# Altium PCB Audio Amplifier.PcbDoc
Units mil, origin at the board's own origin, x right, y up, seen from the top; angles counter-clockwise.
Board outline 4000 x 3000 mil, 4 copper layers (Top Layer, Internal Plane 1, Internal Plane 2, Bottom Layer), stack 18.2 mil thick; 76 components, 51 nets, 223 pads, 10 vias.
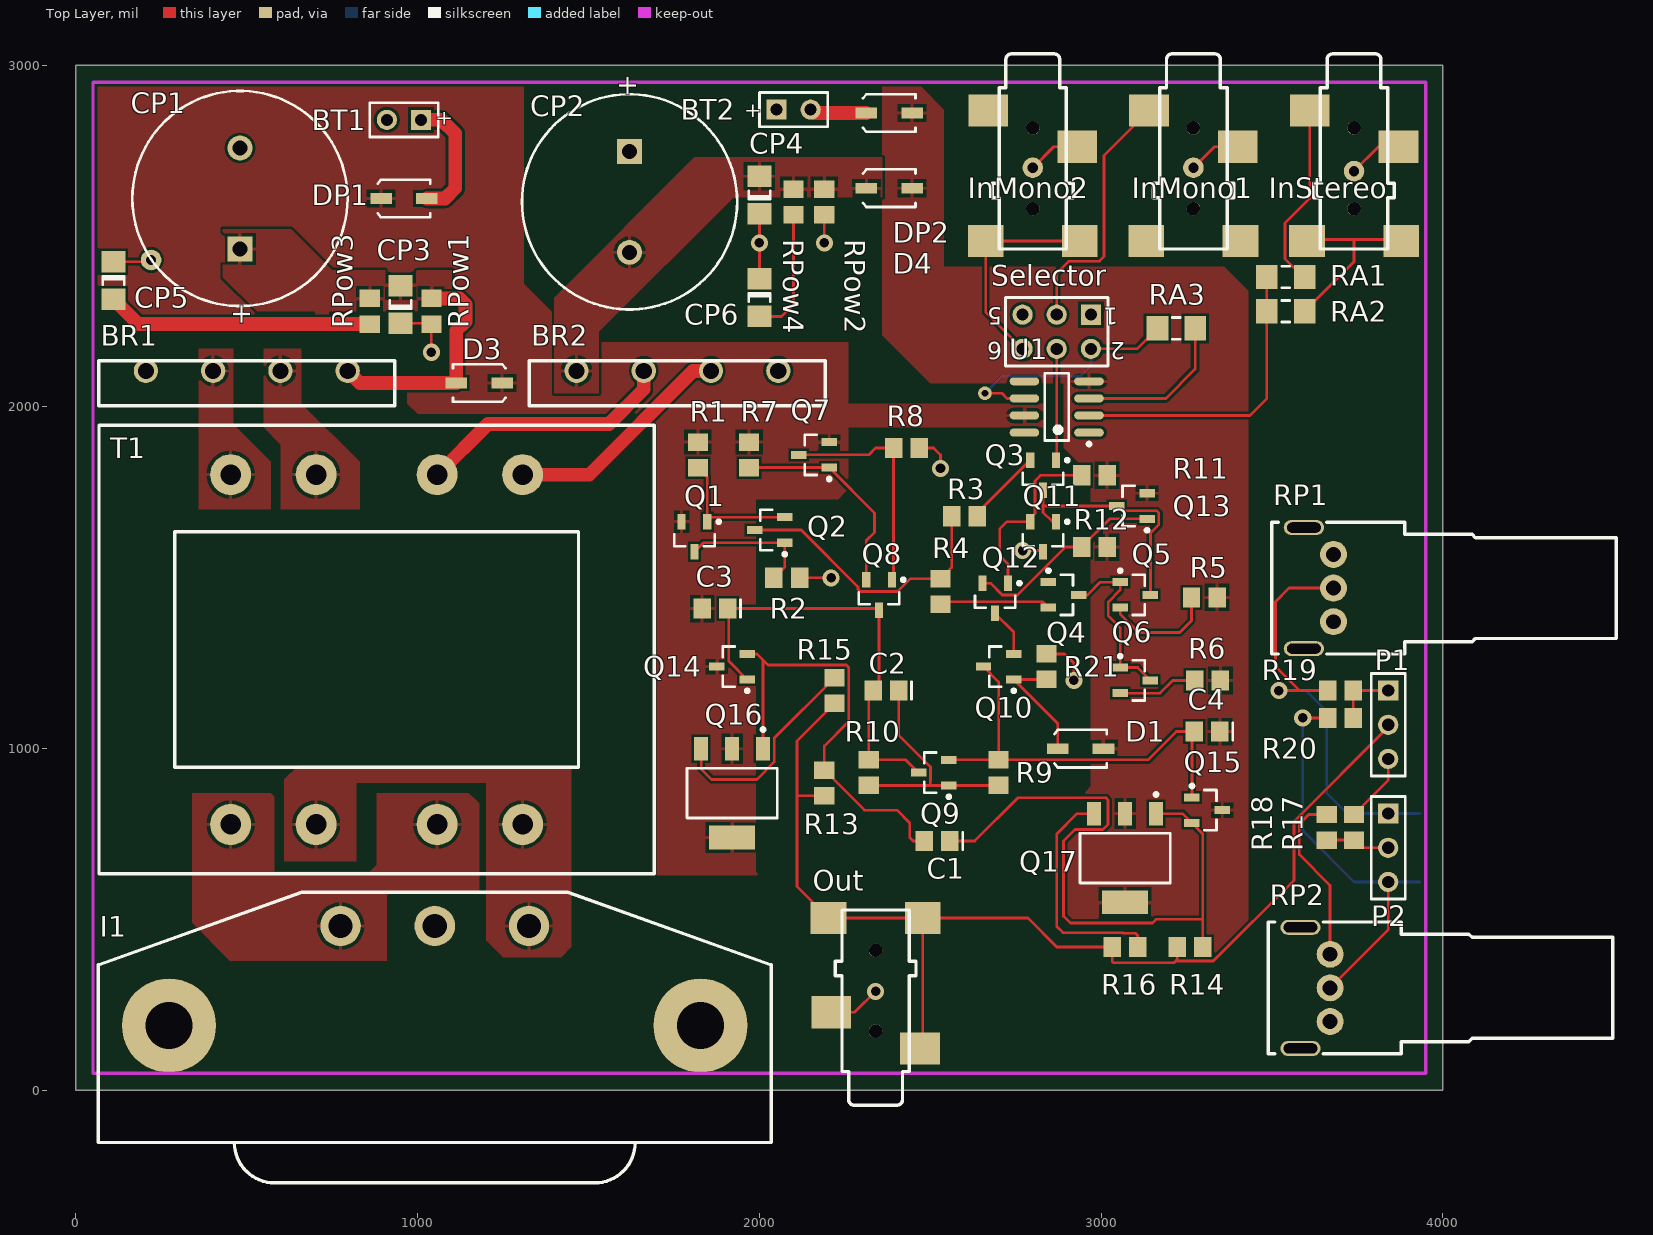
[diagram p0: Top Layer view]
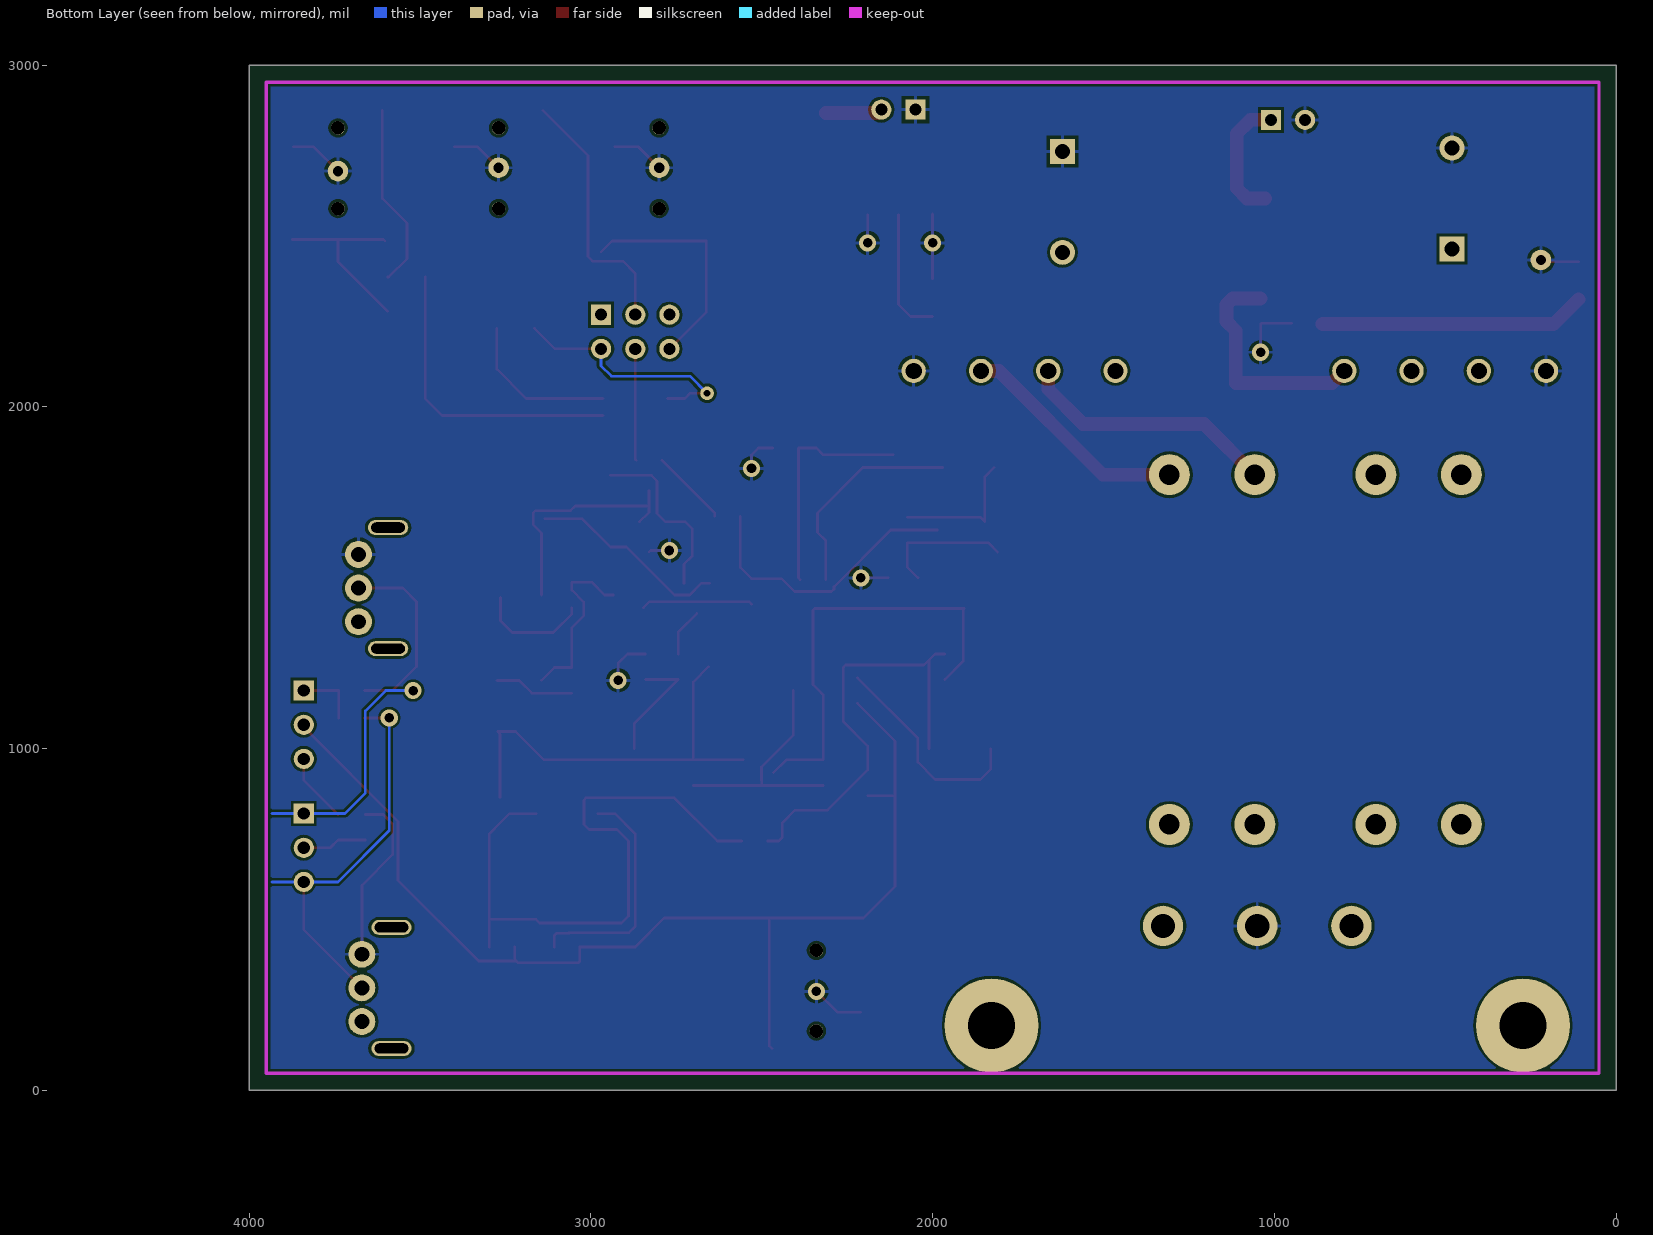
[diagram p1: Bottom Layer view, seen from below]
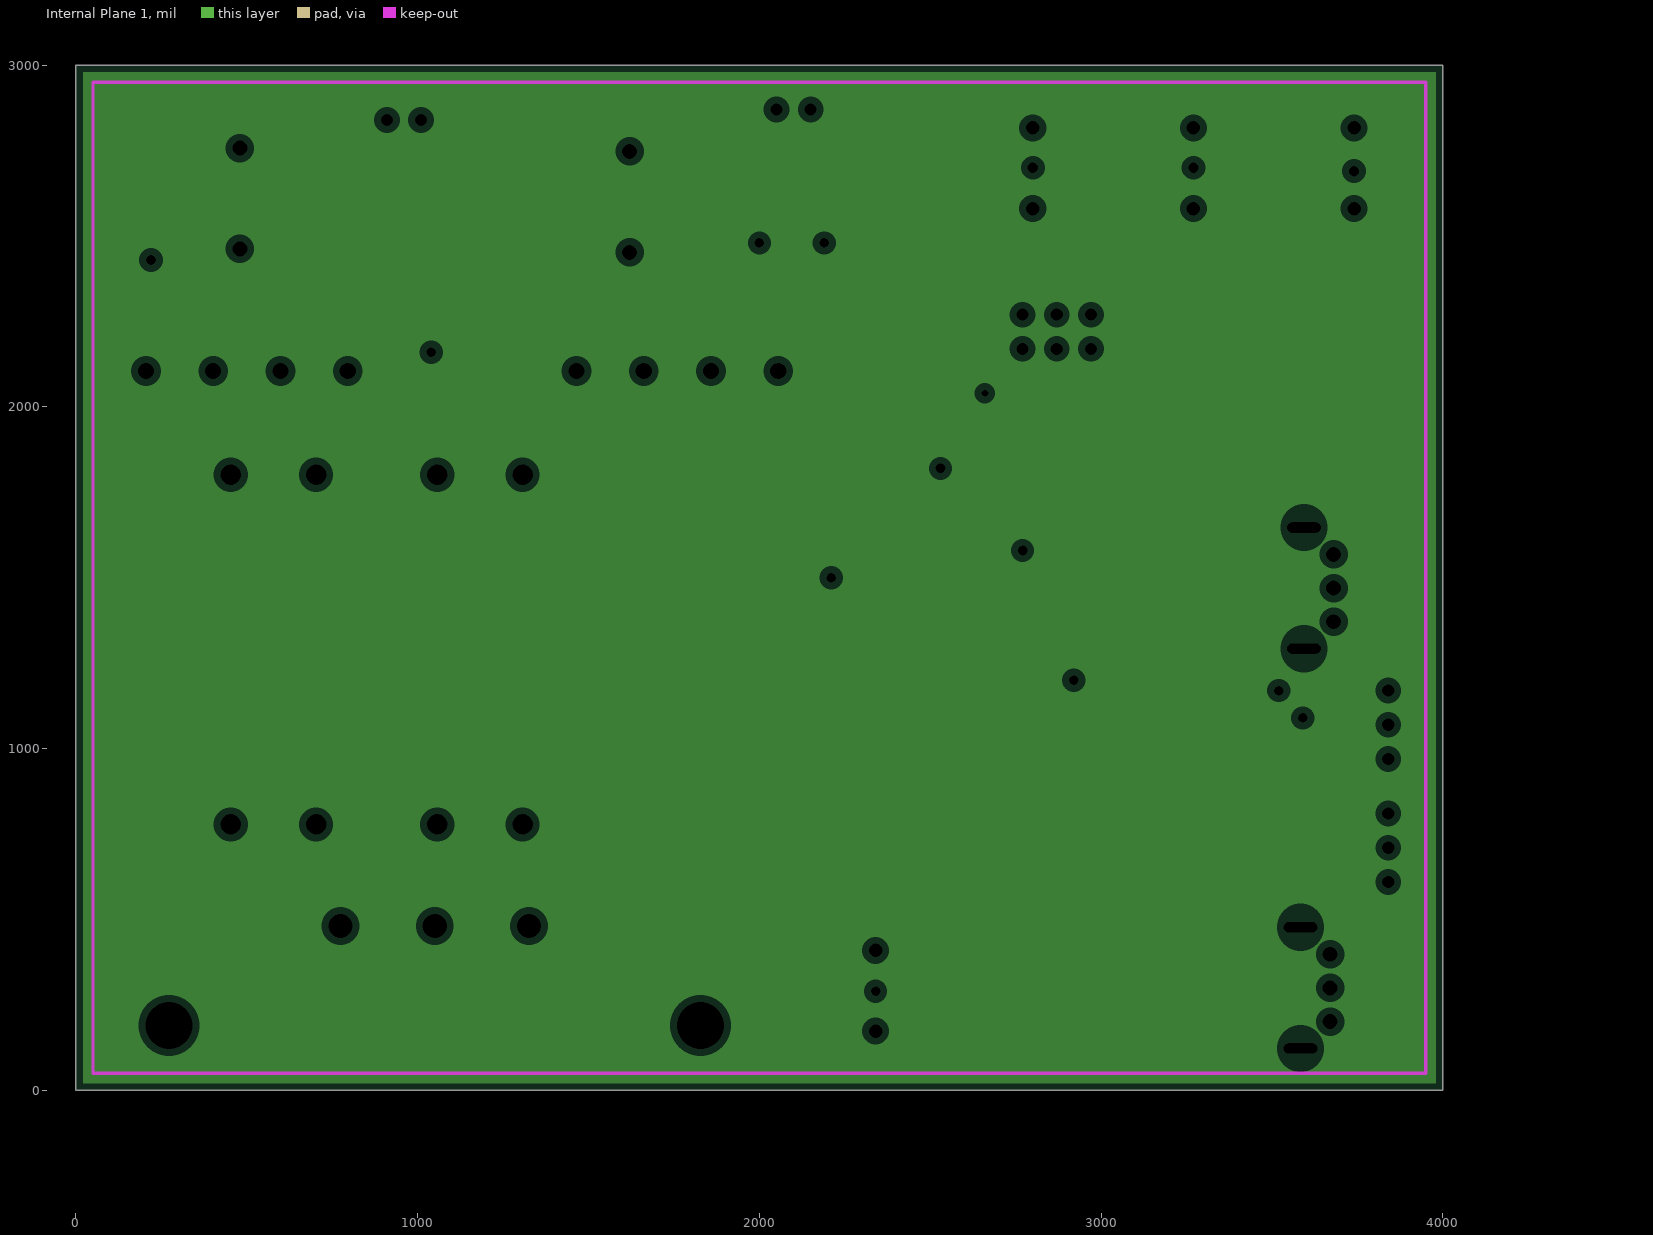
[diagram p2: Internal Plane 1, clearances drawn from the general rule]
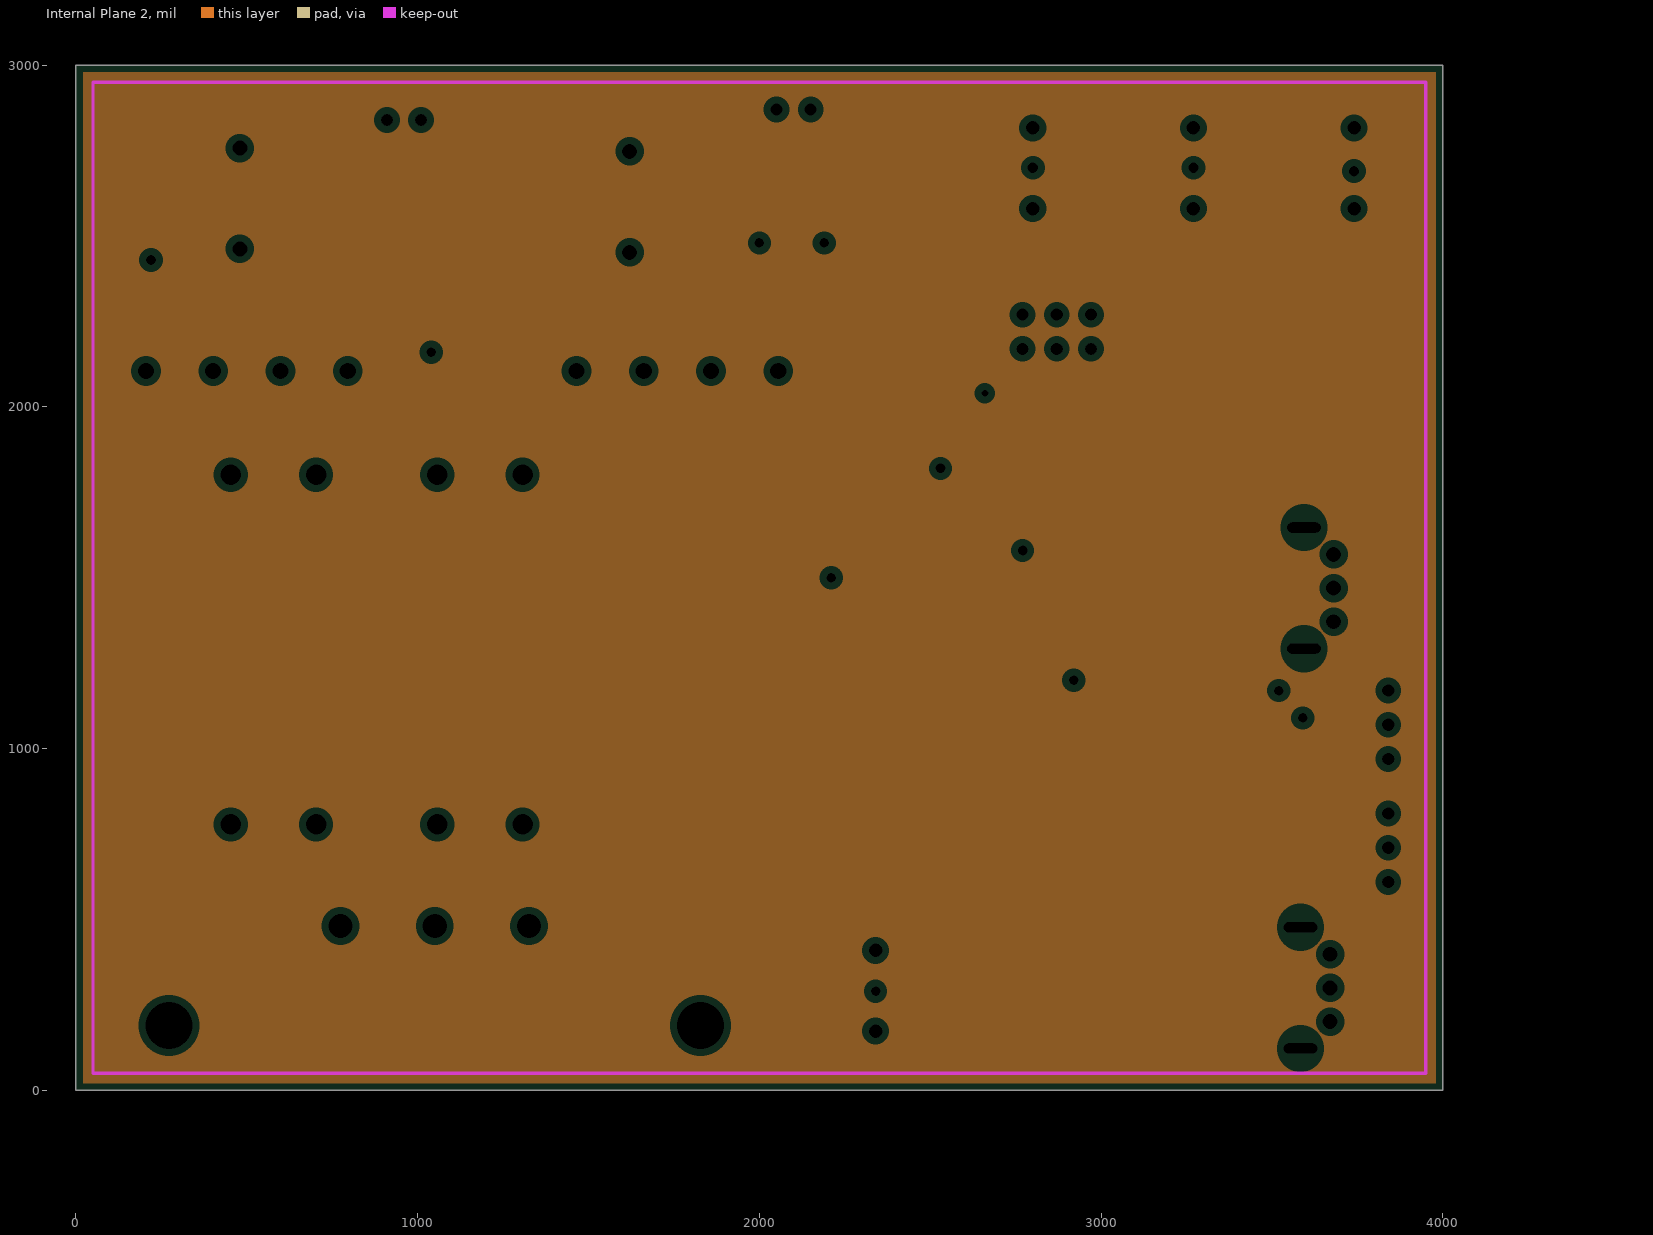
[diagram p3: Internal Plane 2, clearances drawn from the general rule]

## Layer stack, top to bottom
Top Solder: solder mask 0.4, Solder Resist, Dk 3.5
Top Layer: signal copper 1.4
Internal Plane 1: plane copper 1.4
Internal Plane 2: plane copper 1.4
Dielectric 1: dielectric 12.6, FR-4, Dk 4.8
Bottom Layer: signal copper 1.4
Bottom Solder: solder mask 0.4, Solder Resist, Dk 3.5

## Board outline
0,0 4000,0 4000,3000 0,3000

## Design rules (kind name [scope] priority, off if disabled: settings)
Clearance [All] p1: gap=8
Height [All] p1: minheight=0 maxheight=2000 prefheight=500
PlaneClearance [All] p1: clearance=20
PlaneConnect [All] p1: planeconnectstyle=Relief reliefexpansion=20 reliefentries=4 reliefconductorwidth=10 reliefairgap=10
PolygonConnect [All] p1: connectstyle=Relief reliefconductorwidth=10 reliefentries=4 polygonreliefangle="90 Angle" airgapwidth=10
RoutingVias [All] p1: holewidth=25 width=40 viastyle="Through Hole" minholewidth=28 minwidth=50 maxholewidth=28 maxwidth=50
SolderMaskExpansion [All] p1: expansion=4
Width [All] p1: maxlimit=50 minlimit=8 preferedwidth=8 minimp=50.000000 maximp=50.000000 favimp=50.000000
26 further rules are at their usual default settings.

## Components (designator, comment, footprint, x,y, rotation, side; value= is the part's Value field where it differs from the comment)
BR1 "Bridge Rectifier" "Bridge Rectifier" 500,2070 r0 top
BR2 "Bridge Rectifier" "Bridge Rectifier" 1760,2070 r0 top
BT1 "Battery" BAT-2 960,2840 r180 top
BT2 "Battery" BAT-2 2100,2870 r0 top
C1 "C0805" 0805 2520,730 r180 top
C2 "C0805" 0805 2370,1170 r180 top
C3 "C0805" 0805 1870,1410 r180 top
C4 "C0805" 0805 3310,1050 r180 top
CP1 "1000uF" CAPPR7.5-16X25 480,2610 r90 top
CP2 "1000uF" CAPPR7.5-16X25 1620,2600 r270 top
CP3 "C1206" 1206 950,2300 r90 top
CP4 "C1206" 1206 2000,2620 r90 top
CP5 "C1206" 1206 110,2370 r270 top
CP6 "C1206" 1206 2000,2320 r270 top
D1 "BZT52C5V6" SOD-123 2940,1000 r180 top
D3 "BZT52C2V7" SOD-123 1180,2070 r0 top
D4 "BZT52C2V7" SOD-123 2380,2640 r180 top
DP1 "BZT52C2V7" SOD-123 960,2610 r180 top
DP2 "BZT52C2V7" SOD-123 2380,2860 r180 top
I1 "IEC Connector" "IEC Connector" 1050,190 r0 top
InMono1 "Stereo 3.5mm Jack" "3.5mm Audio Jack" 3270,2970 r0 top
InMono2 "Stereo 3.5mm Jack" "3.5mm Audio Jack" 2800,2970 r0 top
InStereo "Stereo 3.5mm Jack" "3.5mm Audio Jack" 3740,2970 r0 top
Out "Stereo 3.5mm Jack" "3.5mm Audio Jack" 2340,20 r180 top
P1 "Header 3" HDR1X3 3840,1170 r270 top
P2 "Header 3" HDR1X3 3840,810 r270 top
Q1 "BCX71K" SOT-23B_N 1810,1620 r270 top
Q2 "BCX71K" SOT-23B_N 2030,1640 r180 top
Q3 "BCX71K" SOT-23B_N 2830,1800 r270 top
Q4 "BCX71K" SOT-23B_N 2890,1450 r0 top
Q5 "BCW71" SOT-23B_N 3100,1450 r0 top
Q6 "BCW71" SOT-23B_N 3100,1200 r0 top
Q7 "BCX71K" SOT-23B_N 2160,1860 r180 top
Q8 "BCX71K" SOT-23B_N 2350,1450 r270 top
Q9 "BCW71" SOT-23B_N 2510,930 r180 top
Q10 "BCW71" SOT-23B_N 2700,1240 r180 top
Q11 "BCW71" SOT-23B_N 2830,1620 r270 top
Q12 "BCW71" SOT-23B_N 2690,1440 r270 top
Q13 "BCW71" SOT-23B_N 3090,1710 r180 top
Q14 "BCW71" SOT-23B_N 1920,1240 r180 top
Q15 "BCX71K" SOT-23B_N 3310,820 r0 top
Q16 "BF720" SOT-223 1920,870 r180 top
Q17 "BF721" SOT-223 3070,680 r180 top
R1 "ERA6Y" ERA-0805 1820,1860 r90 top
R2 "ERA6Y" ERA-0805 2080,1500 r180 top
R3 "ERA6Y" ERA-0805 2600,1680 r0 top
R4 "ERA6Y" ERA-0805 2530,1460 r90 top
R5 "ERA6Y" ERA-0805 3301.81,1442.47 r0 top
R6 "ERA6Y" ERA-0805 3311.81,1199.53 r0 top
R7 "ERA6Y" ERA-0805 1970,1860 r90 top
R8 "ERA6Y" ERA-0805 2430,1880 r180 top
R9 "ERA6Y" ERA-0805 2700,930 r270 top
R10 "ERA6Y" ERA-0805 2320,930 r90 top
R11 "ERA6Y" ERA-0805 2980,1800 r180 top
R12 "ERA6Y" ERA-0805 2980,1590 r180 top
R13 "ERA6Y" ERA-0805 2190,900 r90 top
R14 "ERA6Y" ERA-0805 3260,420 r180 top
R15 "ERA6Y" ERA-0805 2220,1170 r90 top
R16 "ERA6Y" ERA-0805 3070,420 r180 top
R17 "2000" ERA-0805 3740,770 r90 top
R18 "18000" ERA-0805 3660,770 r270 top
R19 "500" ERA-0805 3700,1170 r0 top
R20 "1500" ERA-0805 3700,1090 r0 top
R21 "ERA6Y" ERA-0805 2840,1240 r90 top
RA1 "ERJ8EN" 8-1206 3540,2380 r180 top
RA2 "ERJ8EN" 8-1206 3540,2280 r180 top
RA3 "ERJ8EN" 8-1206 3220,2230 r180 top
RP1 "Panasonic Potentiometer" "Panasonic Potentiometer" 3680,1470 r90 top
RP2 "Panasonic Potentiometer" "Panasonic Potentiometer" 3670,300 r90 top
RPow1 "100K" ERA-0805 1040,2280 r90 top
RPow2 "100K" ERA-0805 2190,2600 r90 top
RPow3 "DNP" ERA-0805 860,2280 r90 top
RPow4 "DNP" ERA-0805 2100,2600 r90 top
Selector "Header 3X2" HDR2X3 2970,2270 r180 top
T1 "Triad Class 3 Transformer" "TRIAD CLASS 3 TRANSFORMER" 880,1290 r90 top
U1 "OPA1611AID" TI-D8_N 2870,2000 r180 top

## Footprints (in the part's own frame and the unit in brackets; to place one, negate y for a bottom-side part, rotate by r counter-clockwise, add the part's x,y. Pads: shape width x height; smd on the part's side, far side on the other; paste and mask are expansions set on the pad)
"3.5mm Audio Jack" [mm]
  round 1 hole 1: 0(0,-9.9) 0(0,-3.9)
  rect 2.95x2.4 smd: 1(-3.3,-2.6) 3(3.3,-5.3)
  rect 2.65x2.4 smd: 2(-3.5,-12.3)
  rect 2.65x2.4 smd paste+0: 2(3.5,-12.3)
  silkscreen extent -3,-12.9 3,1.6
8-1206 [mm] "Chip Resistor; Body 3.1 x 1.6 mm (LxW typ)"
  rect 1.6x1.8 smd: 1(-1.4,0) 2(1.4,0)
  silkscreen extent -0.3,-0.8 0.3,0.8
0805 [mm] "Chip Capacitor; Body 2.0 x 1.2 mm (LxW typ)"
  rect 1.3x1.5 smd: 1(-0.95,0) 2(0.95,0)
  silkscreen extent -1.9,-0.65 -1.9,0.65
1206 [mm] "Chip Capacitor; Body 3.2 x 1.6 mm (LxW typ)"
  rect 1.6x1.8 smd: 1(-1.4,0) 2(1.4,0)
  silkscreen extent -0.3,-0.8 0.3,0.8
BAT-2 [mm] "Battery; 2 Leads"
  rect 1.5x1.5 hole 0.9: 1(-1.27,0)
  round 1.5 hole 0.9: 2(1.27,0)
  silkscreen extent -2.54,-1.27 2.54,1.27
"Bridge Rectifier" [mm]
  round 1.8 hole 1.2: +(7.5,0.9) -(-7.5,0.9) AC1(-2.5,0.9) AC2(2.5,0.9)
  silkscreen extent -11,-1.7 11,1.65
CAPPR7.5-16X25 [mm] "Capacitor, Electrolytic, Radial; Body 16 x 25 mm (Dia.xH typ); Pin Spacing 7.5 mm (typ)"
  rect 1.85x1.85 hole 1.1: 1(-3.75,0)
  round 1.85 hole 1.1: 2(3.75,0)
  silkscreen extent -8,-8 8,8
ERA-0805 [mm] "Chip Resistor; Body 2 x 1.3 mm (LxW typ)"
  rect 1.3x1.5 smd: 1(-0.95,0) 2(0.95,0)
HDR1X3 [mm] "Connector; Header; 3 Position"
  rect 1.5x1.5 hole 0.9: 1(0,0)
  round 1.5 hole 0.9: 2(2.54,0) 3(5.08,0)
  silkscreen extent -1.27,-1.27 6.35,1.27
HDR2X3 [mm] "Connector; Header; 3x2 Position"
  rect 1.5x1.5 hole 0.9: 1(0,0)
  round 1.5 hole 0.9: 2(0,2.54) 3(2.54,0) 4(2.54,2.54) 5(5.08,0) 6(5.08,2.54)
  silkscreen extent -1.27,-1.27 6.35,3.81
"IEC Connector" [mm]
  round 7 hole 3.5: 0(-19.75,0) 0(19.75,0)
  round 3 hole 1.8: GND(0,7.4) HOT(-7,7.4) NEUT(7,7.4)
  silkscreen extent -25,-11.7 25,9.9
"Panasonic Potentiometer" [mm]
  round 2 hole 1.1: 1(-2.5,0) 2(0,0) 3(2.5,0)
  oval 1.1x3 hole 0.75 slot 2.5 at 90 deg: 4(-4.5,2.2) 4(4.5,2.2)
  silkscreen extent -4.9,-21 4.9,4.6
SOD-123 [mm] "SOD-123; 2 Leads; Body 2.7 x 1.6 mm, (LxW)"
  rect 1.6x0.8 smd: 1(-1.7,0) 2(1.7,0)
  silkscreen extent -1.95,-1.4 1.95,1.4
SOT-23B_N [mm] "SOT23, 3-Leads, Body 2.9x1.3mm, Pitch 0.95mm, Lead Span 2.4mm, IPC Medium Density"
  rect 1.15x0.6 smd: 1(-1.125,0.95) 2(-1.125,-0.95) 3(1.125,0)
  silkscreen extent -1.25,-1.5 0.7,1.93, body extent -0.7,-1.5 0.7,1.5, height 1.14
SOT-223 [mm] "SOT-223/SC-73; 4 Leads; Body 6.7 x 7.3 mm, inc. leads (LxW max)"
  rect 1.05x1.75 smd: 1(-2.3,-3.3) 2(0,-3.3) 3(2.3,-3.3)
  rect 3.4x1.75 smd: 4(0,3.3)
  silkscreen extent -3.35,-4.85 3.35,1.85
TI-D8_N [mm] "SOIC, 8-Leads, Body 4.9x3.9mm, Pitch 1.27mm, IPC Medium Density"
  oval 2.2x0.6 smd: 1(-2.4,1.905) 2(-2.4,0.635) 3(-2.4,-0.635) 4(-2.4,-1.905) 5(2.4,-1.905) 6(2.4,-0.635) 7(2.4,0.635) 8(2.4,1.905)
  silkscreen extent -2.53,-2.5 0.9,2.88, body extent -2,-2.5 2,2.5, height 1.75
"TRIAD CLASS 3 TRANSFORMER" [mil]
  round 120 hole 60: 1(-511.81,427.17) 2(-511.81,177.17) 3(-511.81,-177.17) 4(-511.81,-427.17) 5(511.81,427.17) 6(511.81,177.17) 7(511.81,-177.17) 8(511.81,-427.17)
  silkscreen extent -656,-812 656,812

## Part data
BT1 BT2: "Multicell Battery"
C1 C2 C3 C4 CP3 CP4 CP5 CP6: "Ceramic Chip Capacitor - Standard"
CP1 CP2: library part EKA00JG247O00, "Aluminum Electrolytic Capacitor, Radial Style with Long Leads: 47uF, 350V"
D1 D3 D4 DP1 DP2: "Surface Mount Zener Diode"
P1 P2: "Header, 3-Pin"
Q1 Q2 Q3 Q4 Q7 Q8 Q15: "PNP Epitaxial Silicon Transistor"
Q5 Q6 Q9 Q10 Q11 Q12 Q13 Q14: "NPN Epitaxial Silicon Transistor"
Q16: "NPN Silicon High-Voltage Transistor"
Q17: "PNP Silicon High-Voltage Transistor"
R1 R2 R3 R4 R5 R6 R7 R8 R9 R10 R11 R12 R13 R14 R15 R16 R21: "Rectangular Thick Film Chip Resistor, 10 Ohm to 1M Ohm Range, 0.1% and 0.5% Tolerance, 0805 Size, 0.1 W"
R17 R18 R19 R20 RPow1 RPow2 RPow3 RPow4: library part ERA6Y, "Rectangular Thick Film Chip Resistor, 10 Ohm to 1M Ohm Range, 0.1% and 0.5% Tolerance, 0805 Size, 0.1 W"
RA1 RA2 RA3: "Precision Thick Film Chip Resistor, 10 Ohm to 2.2M Ohm Range, 1% Tolerance, 1206 Size, 0.125 W"
Selector: "Header, 3-Pin, Dual row"
U1: "1.1 nV/rtHz Noise, Low Power, Precision Operational Amplifier, 4.5 to 36 V, -40 to 85 degC, 8-pin SOIC (D8), Green (RoHS & no Sb/Br)"

## Free pads (board coordinates)
  round 60 hole 30: 0(220,2430) 1(2800,2700) 2(3270,2700) 3(3740,2690)
  round 40 hole 20: 0(2660,2040)

## Via types
v1: diameter 50, hole 28, Top Layer to Bottom Layer, 10 vias

## Nets (pads, with @x,y where several pads share a name; then routed paths per layer and width w, separated by ;. In a path a pad name is that pad's centre, name@x,y a point inside that pad or via, vN(x,y) a via of type N, cw(c..) or ccw(c..) an arc to the next point about the centre after c; other vN are vias at no path point)
AUDIO_IN: Q3.1 Selector.4 | length 326.8
  Top Layer w8: Q3.1 2870,1846.89 Selector.4
BATTNEG: BT2.2 DP2.2 | length 167.2
  Top Layer w8: BT2.2 BT2.2@2160,2860
  Top Layer w40: BT2.2@2160,2860 DP2.2
BATTPOS: BT1.1 DP1.1 | length 372.1
  Top Layer w40: BT1.1 1070,2840 1110,2800 1110,2640 1080,2610 DP1.1
FEEDBACK: P2.2 R17.1 R18.2 | length 189.4
  Top Layer w8: R18.2 R17.1 3762.6,710 P2.2
GND: BR1.- BR2.+ BT1.2 BT2.1 CP1.2 CP2.1 CP3.1 CP4.1 CP5.1 CP6.1 I1.GND InMono1.3 InMono2.3 InStereo.3 Out.3 pad.0@220,2430 pad.1 pad.2 pad.3 Q11.3 R2.1 R8.1 R18.1 R21.2 RP1.3 RP2.3 RPow1.1 RPow2.1 | length 2078.1
  Top Layer w8: CP5.1 pad.0@215.12,2425.12 ; CP3.1 1037.72,2244.88 RPow1.1 v1(1040,2160) ; CP6.1 v1(2000,2480) CP4.1 ; R2.1@2130,1500 v1@2207.4,1500 ; v1(2190,2480) RPow2.1 ; Out.3 2278.66,228.66 v1(2340,290) ; R8.1 2510,1880 2530,1860 v1(2530,1820) ; v1(2770,1580) 2825.71,1580 Q11.3 ; pad.1 2861.34,2761.34 InMono2.3 ; R21.2 2892.6,1277.4 2920,1250 v1(2920,1200) ; pad.2 3331.34,2761.34 InMono1.3 ; R18.1 3607.4,807.4 3580,780 3580,690 3670,600 RP2.3 ; pad.3 3811.34,2761.34 InStereo.3
  other v1: 2210,1500
IPS_OUT: Q3.3 Q5.3 Q11.1 Q13.3 | length 699.8
  Top Layer w8: Q3.3 2830,1710 ; Q11.1@2857.4,1664.29 2830,1691.69 2830,1710 ; Q5.3 3144.29,1631.18 3168.93,1655.82 3168.93,1689.38 3161.9,1696.41 3059.3,1696.41 Q13.3 2830,1710
NEG: C4.1 D1.1 D4.1 DP2.1 Q13.2 Q15.3 Q17.2 Q17.4 R5.2 R6.2 R11.1 R12.1 U1.4
NetBR1_AC1: BR1.AC1 T1.5
NetBR1_AC2: BR1.AC2 T1.6
NetBR2_AC1: BR2.AC1 T1.7 | length 761.7
  Top Layer w40: T1.7 1205.35,1950 1560,1950 1661.57,2051.57 BR2.AC1
NetBR2_AC2: BR2.AC2 T1.8 | length 677
  Top Layer w40: T1.8 1501.81,1801.81 1805.43,2105.43 BR2.AC2
NetC1_1: C1.1 Q15.2 Q17.1 R14.1 | length 1871.7
  Top Layer w8: C1.1 2630,730 2756.37,856.37 3013.63,856.37 3020,850 3020,778.38 3005.09,763.47 2923.47,763.47 2890,730 2890,510 2910,490 3150,490 3160.55,500.55 3296.85,500.55 3297.4,500 ; Q17.1 3238.39,809.92 Q15.2 3297.4,750.91 3297.4,500 ; R14.1 3297.4,500
NetC1_2: C1.2 Q14.2 Q16.1 R13.2 | length 1306.7
  Top Layer w8: Q14.2 1992.6,1277.4 2010.55,1259.45 ; Q16.1 2010.55,1259.45 ; C1.2 2450,730 2440,740 2440,782.6 2402.6,820 2307.4,820 R13.2 2190,1008.44 2261.53,1079.97 2261.53,1237.96 2254.5,1244.99 2025.01,1244.99 2010.55,1259.45
NetC2_1: C2.1 Q9.1 R9.2 R10.1 | length 696
  Top Layer w8: R10.1 2500,892.6 ; C2.1 2407.4,1039.73 2500.35,946.78 2500.35,906.19 2500,905.84 2500,892.6 ; R9.2 2500,892.6
NetCP5_2: CP5.2 RPow3.1 | length 779.9
  Top Layer w40: CP5.2 182.28,2242.6 RPow3.1
NetCP6_2: CP6.2 RPow4.1 | length 377.1
  Top Layer w8: CP6.2 2064.88,2264.88 2100,2300 RPow4.1
NetD1_2: D1.2 Q10.1 R21.1 | length 351.6
  Top Layer w8: R21.1 Q10.1 2873.07,1073.82 D1.2
NetI1_HOT: I1.HOT T1.1 T1.3
NetI1_NEUT: I1.NEUT T1.2 T1.4 | length 33.1
  Top Layer w8: I1.NEUT I1.NEUT@1325.59,514.41
NetInMono1_1: InMono1.1 Selector.3 | length 761.3
  Top Layer w8: Selector.3 2870,2390 2906.5,2426.5 2994.93,2426.5 3008.43,2440 3008.43,2735.99 InMono1.1
NetInMono2_2: InMono2.2 Selector.6 | length 681.5
  Top Layer w8: Selector.6 2662.2,2277.8 2662.2,2485.75 2937.8,2485.75 InMono2.2@2970,2453.54
NetInStereo_1: InStereo.1 RA1.1 | length 543.2
  Top Layer w8: RA1.1 3591.57,2380 3538.04,2433.53 3538.04,2537.96 3610.08,2610 InStereo.1
NetInStereo_2: InStereo.2 RA2.1 | length 543.1
  Top Layer w8: RA2.1 3740,2424.88 3740,2490 ; InStereo.2@3602.2,2485.75 3606.46,2490 3740,2490 ; InStereo.2@3873.54,2490 3740,2490
NetP1_1: P1.1 R19.2 R20.2 | length 182.6
  Top Layer w8: R20.2 R19.2 P1.1
NetP1_3: P1.3 R17.2 | length 204
  Top Layer w8: R17.2 3840,907.4 P1.3
NetP2_1: P2.1 R19.1 RP1.2 | length 1320.9
  Top Layer w8: v1(3520,1170) 3580,1170 ; R19.1 3580,1170 ; RP1.2 3550,1470 3510,1430 3510,1240 3580,1170
  Bottom Layer w8: v1(3520,1170) 3600,1170 3660,1110 3660,870 3720,810 P2.1 3933,810
NetP2_3: P2.3 R20.1 RP2.2 | length 1188.1
  Top Layer w8: v1(3590,1090) R20.1 ; RP2.2 3840,470 P2.3
  Bottom Layer w8: v1(3590,1090) 3590,760 3740,610 P2.3 3933,610
NetQ1_1: Q1.1 Q2.2 R1.1 | length 402
  Top Layer w8: R1.1 1847.4,1795.2 Q1.1 1860.51,1677.4 Q2.2
NetQ1_3: Q1.3 Q2.1 R2.2 | length 391.2
  Top Layer w8: Q1.3 1836.89,1602.6 Q2.1 2074.29,1531.69 R2.2
NetQ2_3: Q2.3 R3.1 R4.2 | length 834.7
  Top Layer w8: Q2.3 2122.33,1640 2288.79,1473.54 2288.79,1466.68 2295.82,1459.65 2404.18,1459.65 2441.93,1497.4 R4.2 2562.6,1530 R3.1
NetQ3_2: Q3.2 R3.2 | length 228.6
  Top Layer w8: R3.2 2637.4,1689.09 Q3.2
NetQ4_2: Q4.2 R4.1 | length 326.3
  Top Layer w8: R4.1 2537.75,1430.35 2827.96,1430.35 Q4.2
NetQ4_3: Q4.3 Q5.1 Q6.1 Q6.3 | length 519.7
  Top Layer w8: Q4.3 2960,1450 2997.4,1487.4 Q5.1 3055.71,1464.02 3021.07,1429.38 3021.07,1388.79 3055.71,1354.15 Q6.1 3106.89,1237.4 Q6.3
NetQ5_2: Q5.2 R5.1 | length 331.8
  Top Layer w8: Q5.2 3055.71,1394.29 3110,1340 3230,1340 3264.41,1374.41 R5.1
NetQ6_2: Q6.2 R6.1 | length 234
  Top Layer w8: Q6.2 3172.6,1162.6 3209.53,1199.53 R6.1
NetQ7_1: Q7.1 Q8.2 R7.1 | length 627.7
  Top Layer w8: R7.1 Q7.1 2337,1689.89 2337,1633 2312.6,1608.6 Q8.2
NetQ7_3: Q7.3 Q8.1 R8.2 | length 673
  Top Layer w8: Q7.3 2320,1860 2340,1880 R8.2 2392.6,1499.49 Q8.1
NetQ10_2: Q10.2 Q12.3 | length 140.8
  Top Layer w8: Q12.3 2744.29,1341.42 Q10.2
NetQ11_2: Q11.2 Q12.1 R11.2 | length 529.4
  Top Layer w8: Q12.1 2727.4,1540.27 2703,1564.67 2703,1643 2724.29,1664.29 2782.6,1664.29 2806.19,1687.88 2806.19,1783.32 2822.87,1800 R11.2
NetQ12_2: Q12.2 Q13.1 R12.2 | length 588.4
  Top Layer w8: Q12.2 2675.98,1484.29 2710.62,1449.65 2755.36,1449.65 2895.71,1590 R12.2 3025.2,1672.6 Q13.1
NetQ16_3: Q16.3 R15.2 | length 626.8
  Top Layer w8: Q16.3 1829.45,940.55 1860,910 1992.72,910 2043.22,960.5 2043.22,1030.62 R15.2
NetQ17_3: Q17.3 R16.1 | length 685.6
  Top Layer w8: Q17.3 2929.92,809.92 2870,750 2870,480 2888.47,461.53 3063.16,461.53 3064.69,460 3100,460 3107.4,452.6 R16.1
NetRA1_2: RA1.2 RA2.2 U1.2 | length 896.2
  Top Layer w8: U1.2 3435,1975 3484.88,2024.88 RA2.2 RA1.2
NetRA3_1: RA3.1 U1.3 | length 465.4
  Top Layer w8: U1.3 3189.32,2025 3275.12,2110.8 RA3.1
NetRA3_2: pad.0@2660,2040 RA3.2 Selector.2 U1.6 | length 734.6
  Top Layer w8: pad.0@2660,2040 2710,2040 2725,2025 U1.6 ; Selector.2 3104.88,2170 RA3.2
  Bottom Layer w8: pad.0@2660,2040 2710,2090 2940,2090 2970,2120 Selector.2
OUTPUT: Out.1 Out.2 P1.2 R13.1 R14.2 R15.1 R16.2 | length 3332.1
  Top Layer w8: R13.1 2112.6,862.6 2110,860 ; R15.1 2110,1022.6 2110,860 ; Out.1 2477.8,130.24 Out.2@2477.8,504.25 ; R14.2 3222.6,382.6 3218.47,378.47 ; P1.2 3840,1062.63 3564,786.63 3564,614.51 3327.96,378.47 3218.47,378.47 ; 2110,860 2110,596.46 2202.2,504.25 Out.2@2477.8,504.25 ; Out.2@2477.8,504.25 2785.75,504.25 2870,420 R16.2 3032.6,377.4 3036.52,373.48 3213.48,373.48 3218.47,378.47
POS: C3.2 D3.2 DP1.2 Q1.2 Q7.2 Q14.3 Q16.2 Q16.4 R1.2 R7.2 U1.7
"UNFILT NEG": BR2.- CP2.2 CP4.2 D4.2 RPow2.2 RPow4.2
"UNFILT POS": BR1.+ CP1.1 CP3.2 D3.1 RPow1.2 RPow3.2 | length 680.8
  Top Layer w40: BR1.+ 830.71,2070 D3.1 1113.07,2223.07 1140,2250 1140,2300 1122.6,2317.4 RPow1.2
VAS_BOT: C4.2 Q9.2 Q10.3 Q15.1 R9.1 | length 1238.9
  Top Layer w8: Q9.2 R9.1 ; Q10.3 2700,1195.71 R9.1 ; Q15.1 3265.71,1043.11 C4.2 3220,1050 3137.4,967.4 R9.1
VAS_TOP: C2.2 C3.1 Q8.3 Q9.3 Q14.1 R10.2 | length 1287.3
  Top Layer w8: Q14.1 1910.35,1256.54 1910.35,1407.06 C3.1 2345.71,1410 Q8.3 2350,1187.4 C2.2 2320,1157.4 R10.2 2428.31,967.4 Q9.3
pads on no net: I1.0 InMono1.0 InMono1.2 InMono2.0 InMono2.1 InStereo.0 Out.0 Q4.1 RP1.1 RP1.4 RP2.1 RP2.4 Selector.1 Selector.5 U1.1 U1.5 U1.8

## Polygon pours and split planes (outlines as drawn)
GND on Bottom Layer "Bottom Layer-No Net" (solid, remove dead copper, pour order 13): 50,2950 3950,2950 3950,50 50,50
"UNFILT POS" on Top Layer "Bottom Layer-No Net" (solid, remove dead copper, pour order 11): 430,2520 630,2520 750,2400 1100,2400 1100,2280 740,2280 740,2150 700,2150 700,2280 530,2280 430,2380
POS on Top Layer "Bottom Layer-No Net" (solid, remove dead copper, pour order 19): 1700,630 2000,630 1990,640 1990,1730 2230,1730 2260,1760 2260,1940 2830,1940 2830,2010 2260,2010 2260,2190 1480,2190 1310,2360 1310,2940 70,2940 60,2950 60,2150 940,2150 970,2120 970,2010 1000,1980 1680,1980 1680,1970 1700,1950
NetI1_HOT on Top Layer "Bottom Layer-No Net" (solid, pour order 15): 340,870 570,870 580,860 580,640 860,640 880,660 880,870 1150,870 1170,850 1180,840 1180,580 920,580 910,570 910,380 450,380 340,490 340,870
NetI1_NEUT on Top Layer "Bottom Layer-No Net" (solid, pour order 16): 600,860 610,850 610,670 820,670 820,880 820,900 1200,900 1200,440 1250,390 1420,390 1450,420 1450,950 650,950 610,910 610,850
NetBR1_AC1 on Top Layer "Bottom Layer-No Net" (solid, pour order 17): 360,2170 460,2170 460,1950 570,1840 570,1700 360,1700 360,2170
NetBR1_AC2 on Top Layer "Bottom Layer-No Net" (solid, pour order 18): 550,2170 660,2170 660,2010 830,1840 830,1700 600,1700 600,1870 600,1890 550,1940 550,2170
"UNFILT NEG" on Top Layer "Bottom Layer-No Net" (solid, remove dead copper, pour order 12): 1400,2040 1530,2040 1530,2220 1924.25,2614.25 2360,2614.25 2360,2730 1810,2730 1400,2320
NEG on Top Layer "Bottom Layer-No Net" (solid, remove dead copper, pour order 14): 2360,2950 2360,2210 2500,2070 2890,2070 2890,1880 2970,1800 2970,890 2850,770 2850,220 2950,120 3270,120 3430,280 3430,2340 3360,2410 2540,2410 2540,2870 2460,2950

## Keep-outs
Keep-Out Layer:
  lines w10: 50,50 50,2950 3950,2950 3950,50 50,50

## Dimensions
50,50 to 50,2950 on Mechanical 1
50,50 to 3950,50 on Mechanical 1

## Text inside footprints (layer, text, board x,y; h text height)
BT1: Top Overlay "+" at 1104.49,2862.72 h45.28 r180
BT2: Top Overlay "+" at 1955.51,2847.28 h45.28
CP1: Top Overlay "+" at 509.53,2236.97 h59.06 r90
CP2: Top Overlay "+" at 1590.47,2973.03 h59.06 r270
Selector: Top Overlay "6" at 2710,2190 h50 r180; Top Overlay "5" at 2710,2290 h50 r180; Top Overlay "2" at 3070,2190 h50 r180; Top Overlay "1" at 3050,2290 h50 r180